# Altium PCB SW-SMD_L3.9-W3.0-P4.45.pcbdoc
Units mm, origin at the board's own origin, x right, y up, seen from the top; angles counter-clockwise.
Board outline 18.3 x 15.78 mm, 2 copper layers (Top Layer, Bottom Layer), stack 0 mm thick; 1 components, 0 nets, 2 pads, 0 vias.
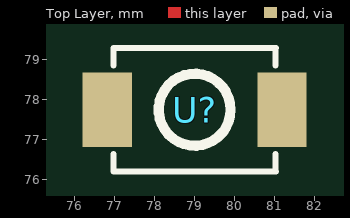
[diagram p0: Top Layer view]
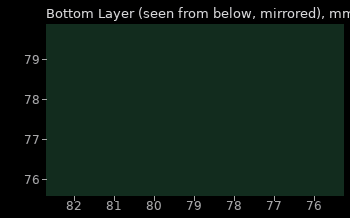
[diagram p1: Bottom Layer view, seen from below]

## Layer stack, top to bottom
Top Layer: signal copper (thickness not stored)
Bottom Layer: signal copper (thickness not stored)

## Board outline
88.15,69.85 69.85,69.85 69.85,85.632 88.15,85.632

## Components (designator, comment, footprint, x,y, rotation, side; value= is the part's Value field where it differs from the comment)
U? "" SW-SMD_L3.9-W3.0-P4.45 79,77.741 r0 top

## Footprints (in the part's own frame and the unit in brackets; to place one, negate y for a bottom-side part, rotate by r counter-clockwise, add the part's x,y. Pads: shape width x height; smd on the part's side, far side on the other; paste and mask are expansions set on the pad)
SW-SMD_L3.9-W3.0-P4.45 [mm]
  rect 1.23x1.86 smd: 1(-2.185,0) 2(2.185,0)
  silkscreen extent -2.03,-1.54 2.03,1.54

## Nets (pads, with @x,y where several pads share a name; then routed paths per layer and width w, separated by ;. In a path a pad name is that pad's centre, name@x,y a point inside that pad or via, vN(x,y) a via of type N, cw(c..) or ccw(c..) an arc to the next point about the centre after c; other vN are vias at no path point)
pads on no net: U?.1 U?.2